# Altium PCB Motor Driver.PcbDoc
Units mm, origin at the board's own origin, x right, y up, seen from the top; angles counter-clockwise.
Board outline 62.7 x 50.04 mm, 2 copper layers (Top Layer, Bottom Layer); 64 components, 48 nets, 252 pads, 522 vias.
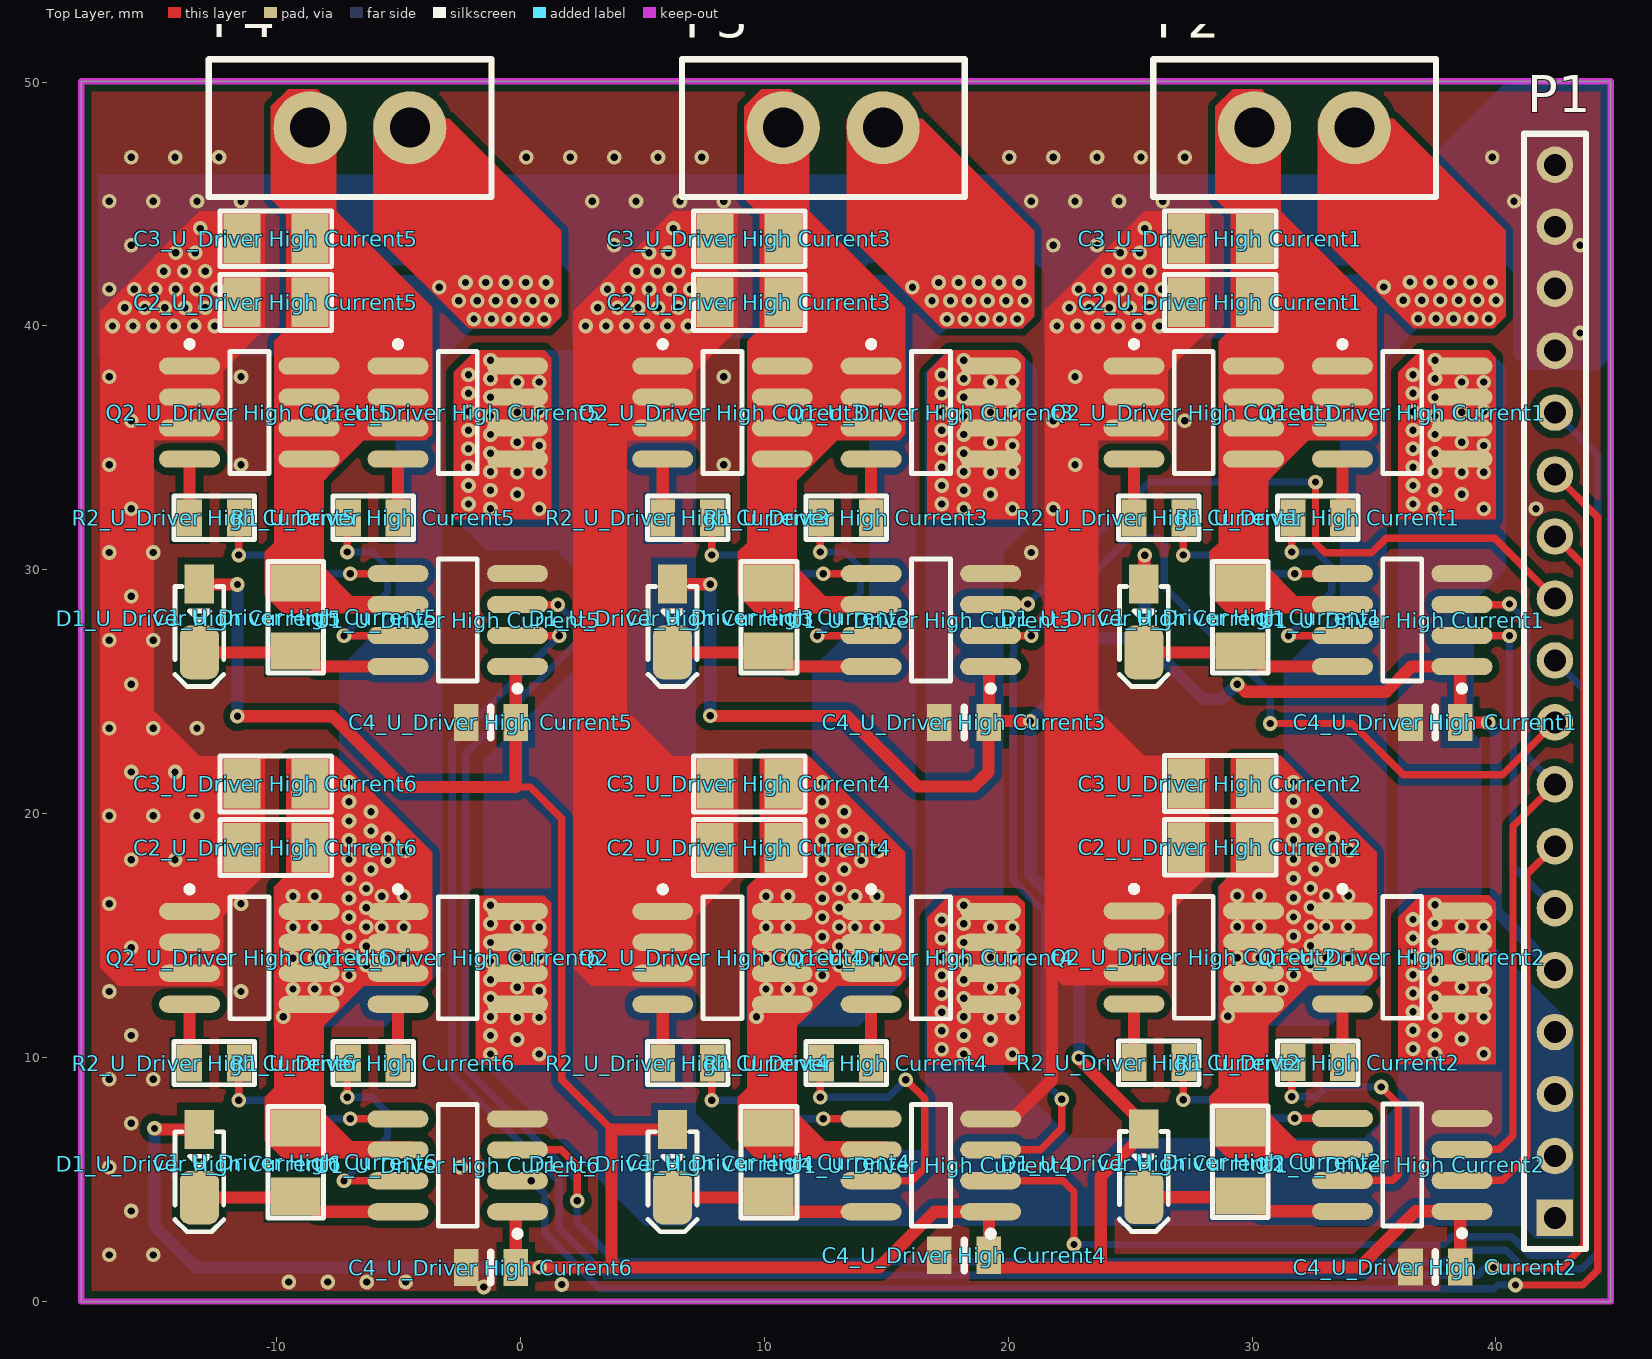
[diagram p0: Top Layer view]
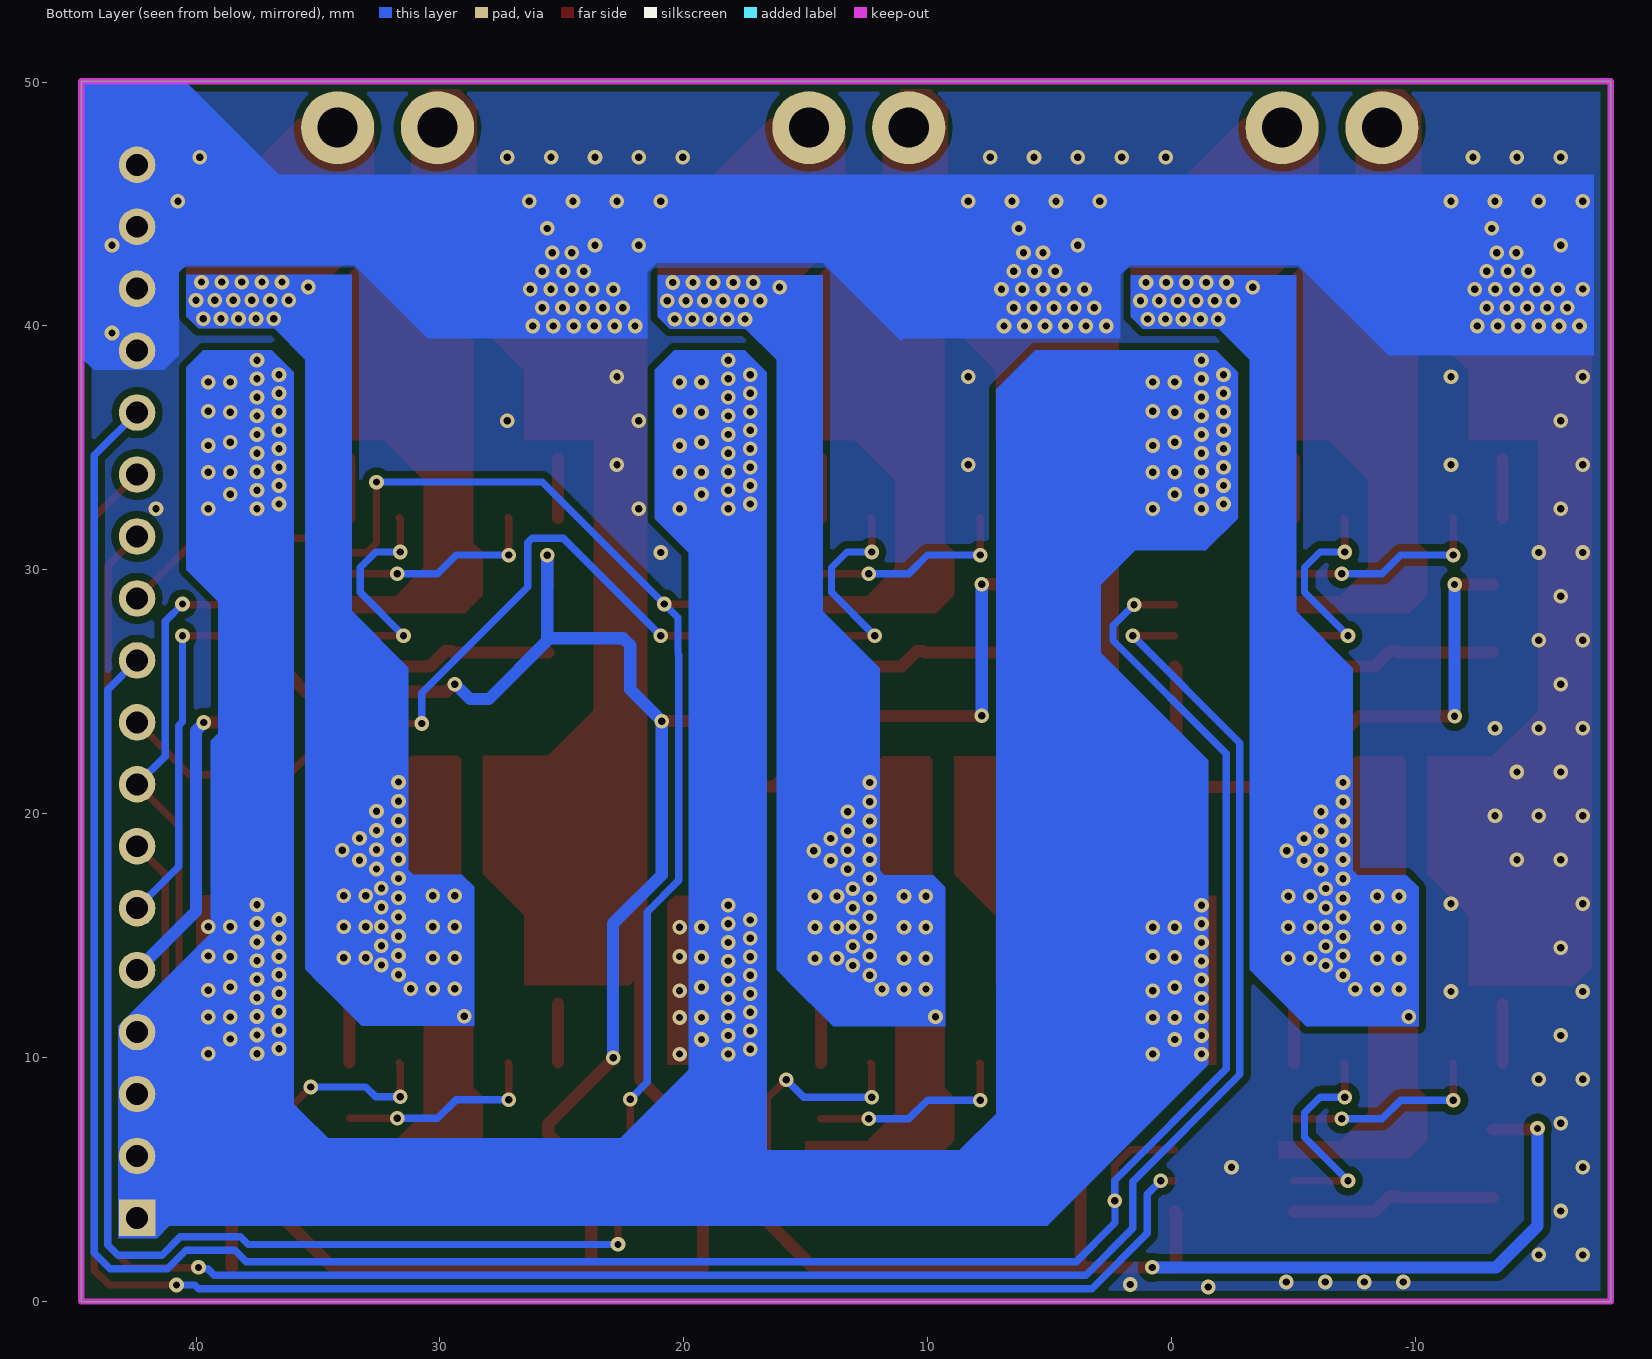
[diagram p1: Bottom Layer view, seen from below]
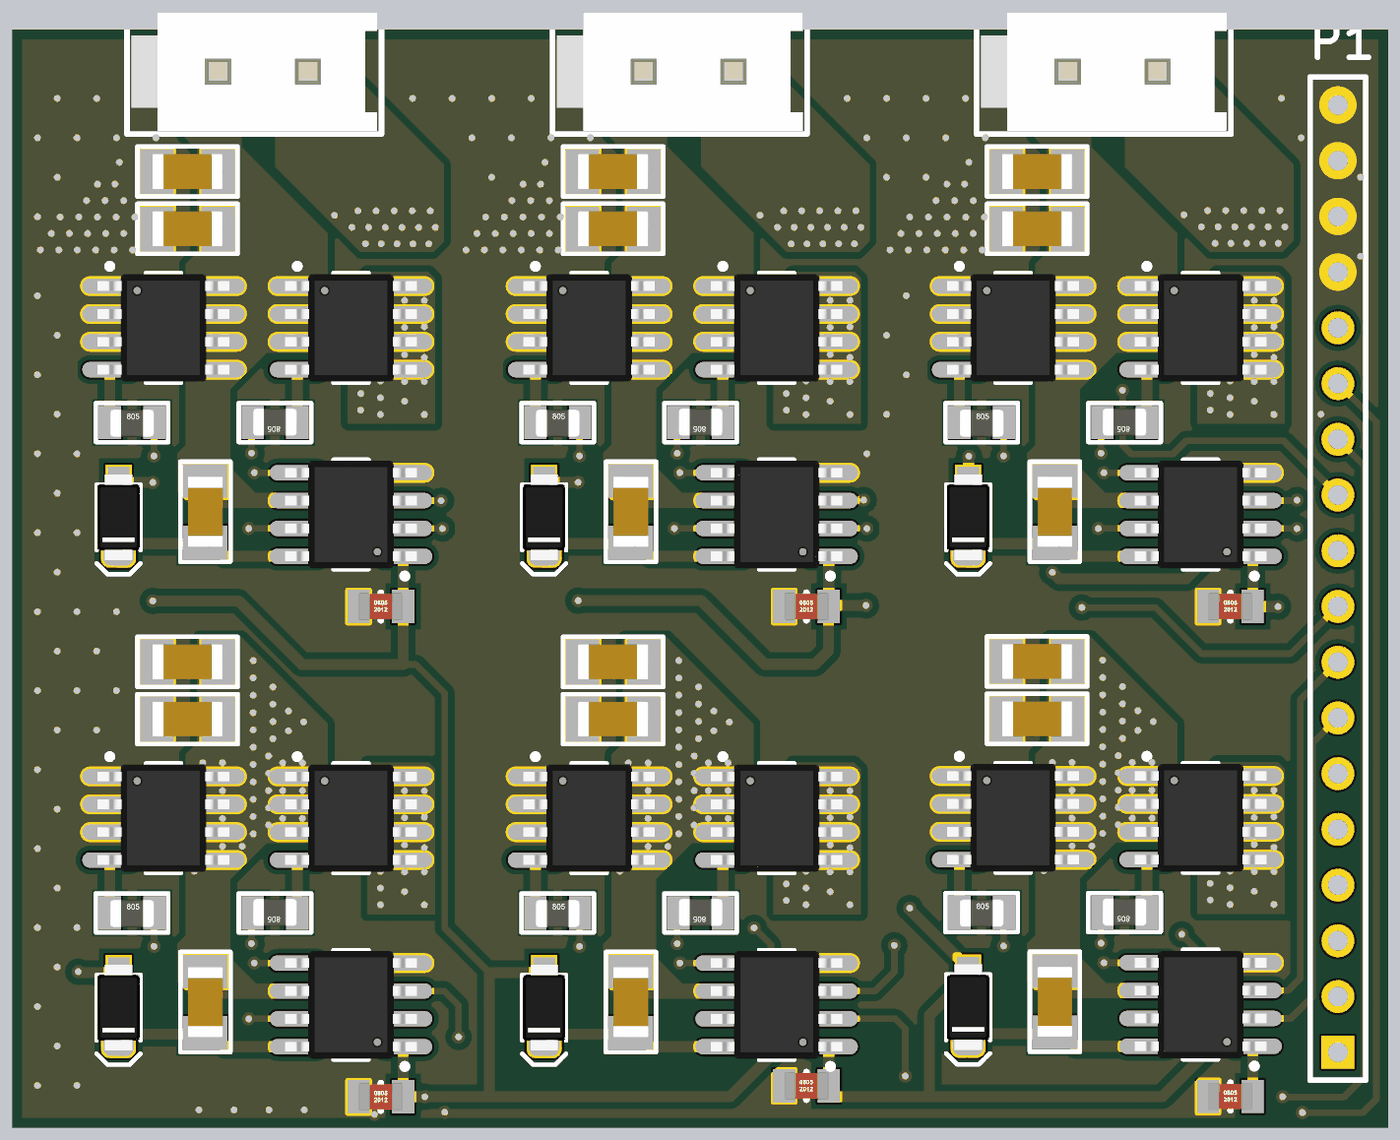
[diagram p2: 3D render of the assembled board from above, using the file's embedded part models]

## Layer stack, top to bottom
Top Solder: solder mask 0.0102, Solder Resist, Dk 3.5
Top Layer: signal copper 0.0356
Dielectric 1: dielectric 0.32, FR-4, Dk 4.8
Bottom Layer: signal copper 0.0356
Bottom Solder: solder mask 0.0102, Solder Resist, Dk 3.5

## Board outline
-18,0 -18,50.038 44.704,50.038 44.704,0

## Design rules (kind name [scope] priority, off if disabled: settings)
Clearance Clearance_1 [InNamedPolygon('TOP') Or InNamedPolygon('BOT')] p1: gap=0.3 ignorepadtopadclearanceinfootprint=FALSE
Clearance [All] p2: gap=0.254 ignorepadtopadclearanceinfootprint=FALSE except(0: Arc-Hole Track-Hole SMDPad-Hole THPad-Hole Via-Hole Fill-Hole Poly-Hole Region-Hole Text-Hole)
PolygonConnect [All] p1: connectstyle=Direct reliefconductorwidth=0.254 reliefentries=4 polygonreliefangle="90 Angle" airgapwidth=0.254
RoomDefinition "U_Driver High Current3" [InComponentClass('U_Driver High Current3')] p1: confinementstyle=ConfineIn formatcopy=TRUE lockcomponents=FALSE outline 21.114,22.777 21.114,45.085 3.842,45.085 3.842,22.777
RoomDefinition "U_Driver High Current4" [InComponentClass('U_Driver High Current4')] p2: confinementstyle=ConfineIn formatcopy=TRUE lockcomponents=FALSE outline 21.114,0.425 21.114,22.733 3.842,22.733 3.842,0.425
RoomDefinition "U_Driver High Current6" [InComponentClass('U_Driver High Current6')] p3: confinementstyle=ConfineIn formatcopy=TRUE lockcomponents=FALSE outline 1.715,0.425 1.715,22.733 -15.557,22.733 -15.557,0.425
RoomDefinition "U_Driver High Current5" [InComponentClass('U_Driver High Current5')] p4: confinementstyle=ConfineIn formatcopy=TRUE lockcomponents=FALSE outline 1.715,22.777 1.715,45.085 -15.557,45.085 -15.557,22.777
RoomDefinition "U_Driver High Current2" [InComponentClass('U_Driver High Current2')] p5: confinementstyle=ConfineIn formatcopy=TRUE lockcomponents=FALSE outline 40.439,0.442 40.439,22.75 23.167,22.75 23.167,0.442
RoomDefinition "U_Driver High Current1" [InComponentClass('U_Driver High Current1')] p6: confinementstyle=ConfineIn formatcopy=TRUE lockcomponents=FALSE outline 40.439,22.777 40.439,45.085 23.167,45.085 23.167,22.777
RoutingVias [All] p1: holewidth=0.3 width=0.6 viastyle="Through Hole" minholewidth=0.3 minwidth=0.6 maxholewidth=0.5 maxwidth=1
SolderMaskExpansion VIA [IsVia] p1: expansion=0.102 istentingtop=TRUE
SolderMaskExpansion [All] p2: expansion=0.102 istentingtop=FALSE
Width [All] p1: maxlimit=2 minlimit=0.3 preferedwidth=1
30 further rules are at their usual default settings.

## Classes and differential pairs
net class OUT[1..6]: OUT1 OUT2 OUT3 OUT4 OUT5 OUT6
channel class "Driver High Current": "U_Driver High Current1" "U_Driver High Current2" "U_Driver High Current3" "U_Driver High Current4" "U_Driver High Current5" "U_Driver High Current6"
net class SD[1..6]: SD1 SD3 SD5
net class IN[1..6]: IN1 IN2 IN3 IN4 IN5 IN6
component class "U_Driver High Current6": "C1_U_Driver High Current6" "C2_U_Driver High Current6" "C3_U_Driver High Current6" "C4_U_Driver High Current6" "D1_U_Driver High Current6" "Q1_U_Driver High Current6" "Q2_U_Driver High Current6" "R1_U_Driver High Current6" "R2_U_Driver High Current6" "U1_U_Driver High Current6"
component class "U_Driver High Current5": "C1_U_Driver High Current5" "C2_U_Driver High Current5" "C3_U_Driver High Current5" "C4_U_Driver High Current5" "D1_U_Driver High Current5" "Q1_U_Driver High Current5" "Q2_U_Driver High Current5" "R1_U_Driver High Current5" "R2_U_Driver High Current5" "U1_U_Driver High Current5"
component class "U_Driver High Current4": "C1_U_Driver High Current4" "C2_U_Driver High Current4" "C3_U_Driver High Current4" "C4_U_Driver High Current4" "D1_U_Driver High Current4" "Q1_U_Driver High Current4" "Q2_U_Driver High Current4" "R1_U_Driver High Current4" "R2_U_Driver High Current4" "U1_U_Driver High Current4"
component class "U_Driver High Current3": "C1_U_Driver High Current3" "C2_U_Driver High Current3" "C3_U_Driver High Current3" "C4_U_Driver High Current3" "D1_U_Driver High Current3" "Q1_U_Driver High Current3" "Q2_U_Driver High Current3" "R1_U_Driver High Current3" "R2_U_Driver High Current3" "U1_U_Driver High Current3"
component class "U_Driver High Current2": "C1_U_Driver High Current2" "C2_U_Driver High Current2" "C3_U_Driver High Current2" "C4_U_Driver High Current2" "D1_U_Driver High Current2" "Q1_U_Driver High Current2" "Q2_U_Driver High Current2" "R1_U_Driver High Current2" "R2_U_Driver High Current2" "U1_U_Driver High Current2"
component class "U_Driver High Current1": "C1_U_Driver High Current1" "C2_U_Driver High Current1" "C3_U_Driver High Current1" "C4_U_Driver High Current1" "D1_U_Driver High Current1" "Q1_U_Driver High Current1" "Q2_U_Driver High Current1" "R1_U_Driver High Current1" "R2_U_Driver High Current1" "U1_U_Driver High Current1"
component class main: P1 P2 P3 P4

## Components (designator, comment, footprint, x,y, rotation, side; value= is the part's Value field where it differs from the comment)
"C1_U_Driver High Current1" "10UF" SMD-1206C 29.517,28.067 r180 top value=0.033µF (schematic designator C1)
"C1_U_Driver High Current2" "10UF" SMD-1206C 29.517,5.732 r180 top value=0.033µF (schematic designator C1)
"C1_U_Driver High Current3" "10UF" SMD-1206C 10.192,28.067 r180 top value=0.033µF (schematic designator C1)
"C1_U_Driver High Current4" "10UF" SMD-1206C 10.192,5.715 r180 top value=0.033µF (schematic designator C1)
"C1_U_Driver High Current5" "10UF" SMD-1206C -9.207,28.067 r180 top value=0.033µF (schematic designator C1)
"C1_U_Driver High Current6" "10UF" SMD-1206C -9.207,5.715 r180 top value=0.033µF (schematic designator C1)
"C2_U_Driver High Current1" "10UF" SMD-1206C 28.705,40.965 r270 top value=0.033µF (schematic designator C2)
"C2_U_Driver High Current2" "10UF" SMD-1206C 28.705,18.63 r270 top value=0.033µF (schematic designator C2)
"C2_U_Driver High Current3" "10UF" SMD-1206C 9.38,40.965 r270 top value=0.033µF (schematic designator C2)
"C2_U_Driver High Current4" "10UF" SMD-1206C 9.38,18.613 r270 top value=0.033µF (schematic designator C2)
"C2_U_Driver High Current5" "10UF" SMD-1206C -10.019,40.965 r270 top value=0.033µF (schematic designator C2)
"C2_U_Driver High Current6" "10UF" SMD-1206C -10.019,18.613 r270 top value=0.033µF (schematic designator C2)
"C3_U_Driver High Current1" "10UF" SMD-1206C 28.705,43.576 r270 top value=0.033µF (schematic designator C3)
"C3_U_Driver High Current2" "10UF" SMD-1206C 28.705,21.241 r270 top value=0.033µF (schematic designator C3)
"C3_U_Driver High Current3" "10UF" SMD-1206C 9.38,43.576 r270 top value=0.033µF (schematic designator C3)
"C3_U_Driver High Current4" "10UF" SMD-1206C 9.38,21.224 r270 top value=0.033µF (schematic designator C3)
"C3_U_Driver High Current5" "10UF" SMD-1206C -10.019,43.576 r270 top value=0.033µF (schematic designator C3)
"C3_U_Driver High Current6" "10UF" SMD-1206C -10.019,21.224 r270 top value=0.033µF (schematic designator C3)
"C4_U_Driver High Current1" "100nF" SMD-0805C 37.518,23.749 r270 top value=10000pF (schematic designator C4)
"C4_U_Driver High Current2" "100nF" SMD-0805C 37.518,1.414 r270 top value=10000pF (schematic designator C4)
"C4_U_Driver High Current3" "100nF" SMD-0805C 18.193,23.749 r270 top value=10000pF (schematic designator C4)
"C4_U_Driver High Current4" "100nF" SMD-0805C 18.193,1.897 r270 top value=10000pF (schematic designator C4)
"C4_U_Driver High Current5" "100nF" SMD-0805C -1.206,23.749 r270 top value=10000pF (schematic designator C4)
"C4_U_Driver High Current6" "100nF" SMD-0805C -1.206,1.397 r270 top value=10000pF (schematic designator C4)
"D1_U_Driver High Current1" "1N5819" D_SOD123W 25.562,27.813 r270 top (schematic designator D1)
"D1_U_Driver High Current2" "1N5819" D_SOD123W 25.562,5.478 r270 top (schematic designator D1)
"D1_U_Driver High Current3" "1N5819" D_SOD123W 6.237,27.813 r270 top (schematic designator D1)
"D1_U_Driver High Current4" "1N5819" D_SOD123W 6.237,5.461 r270 top (schematic designator D1)
"D1_U_Driver High Current5" "1N5819" D_SOD123W -13.162,27.813 r270 top (schematic designator D1)
"D1_U_Driver High Current6" "1N5819" D_SOD123W -13.162,5.461 r270 top (schematic designator D1)
P1 "FHDR_1X18" FHDR1X18-254P 42.418,3.429 r90 top locked
P2 "M1" "ATX 2PIN" 34.197,48.133 r90 top
P3 "M2" "ATX 2PIN" 14.872,48.133 r90 top
P4 "M3" "ATX 2PIN" -4.527,48.133 r90 top
"Q1_U_Driver High Current1" "IRF7811AV" SOIC-8 31.967,33.401 r0 top (schematic designator Q1)
"Q1_U_Driver High Current2" "IRF7811AV" SOIC-8 31.967,11.066 r0 top (schematic designator Q1)
"Q1_U_Driver High Current3" "IRF7811AV" SOIC-8 12.642,33.401 r0 top (schematic designator Q1)
"Q1_U_Driver High Current4" "IRF7811AV" SOIC-8 12.642,11.049 r0 top (schematic designator Q1)
"Q1_U_Driver High Current5" "IRF7811AV" SOIC-8 -6.757,33.401 r0 top (schematic designator Q1)
"Q1_U_Driver High Current6" "IRF7811AV" SOIC-8 -6.757,11.049 r0 top (schematic designator Q1)
"Q2_U_Driver High Current1" "IRF7811AV" SOIC-8 23.421,33.401 r0 top (schematic designator Q2)
"Q2_U_Driver High Current2" "IRF7811AV" SOIC-8 23.421,11.066 r0 top (schematic designator Q2)
"Q2_U_Driver High Current3" "IRF7811AV" SOIC-8 4.096,33.401 r0 top (schematic designator Q2)
"Q2_U_Driver High Current4" "IRF7811AV" SOIC-8 4.096,11.049 r0 top (schematic designator Q2)
"Q2_U_Driver High Current5" "IRF7811AV" SOIC-8 -15.303,33.401 r0 top (schematic designator Q2)
"Q2_U_Driver High Current6" "IRF7811AV" SOIC-8 -15.303,11.049 r0 top (schematic designator Q2)
"R1_U_Driver High Current1" "10R" SMD-0805-RES 32.692,32.131 r90 top value=1 (schematic designator R1)
"R1_U_Driver High Current2" "10R" SMD-0805-RES 32.692,9.796 r90 top value=1 (schematic designator R1)
"R1_U_Driver High Current3" "10R" SMD-0805-RES 13.367,32.131 r90 top value=1 (schematic designator R1)
"R1_U_Driver High Current4" "10R" SMD-0805-RES 13.367,9.779 r90 top value=1 (schematic designator R1)
"R1_U_Driver High Current5" "10R" SMD-0805-RES -6.032,32.131 r90 top value=1 (schematic designator R1)
"R1_U_Driver High Current6" "10R" SMD-0805-RES -6.032,9.779 r90 top value=1 (schematic designator R1)
"R2_U_Driver High Current1" "10R" SMD-0805-RES 26.18,32.131 r270 top value=1 (schematic designator R2)
"R2_U_Driver High Current2" "10R" SMD-0805-RES 26.18,9.796 r270 top value=1 (schematic designator R2)
"R2_U_Driver High Current3" "10R" SMD-0805-RES 6.855,32.131 r270 top value=1 (schematic designator R2)
"R2_U_Driver High Current4" "10R" SMD-0805-RES 6.855,9.779 r270 top value=1 (schematic designator R2)
"R2_U_Driver High Current5" "10R" SMD-0805-RES -12.544,32.131 r270 top value=1 (schematic designator R2)
"R2_U_Driver High Current6" "10R" SMD-0805-RES -12.544,9.779 r270 top value=1 (schematic designator R2)
"U1_U_Driver High Current1" "IR2104S" SOIC-8 40.349,30.988 r180 top (schematic designator U1)
"U1_U_Driver High Current2" "IR2104S" SOIC-8 40.349,8.653 r180 top (schematic designator U1)
"U1_U_Driver High Current3" "IR2104S" SOIC-8 21.024,30.988 r180 top (schematic designator U1)
"U1_U_Driver High Current4" "IR2104S" SOIC-8 21.024,8.636 r180 top (schematic designator U1)
"U1_U_Driver High Current5" "IR2104S" SOIC-8 1.625,30.988 r180 top (schematic designator U1)
"U1_U_Driver High Current6" "IR2104S" SOIC-8 1.625,8.636 r180 top (schematic designator U1)

## Footprints (in the part's own frame and the unit in brackets; to place one, negate y for a bottom-side part, rotate by r counter-clockwise, add the part's x,y. Pads: shape width x height; smd on the part's side, far side on the other; paste and mask are expansions set on the pad)
"ATX 2PIN" [mm]
  round 3 hole 1.65: 1(0,4.095) 2(0,0)
  silkscreen extent -2.85,-3.35 2.8,8.25, body extent -2.7,-3.15 2.7,8.05, height 13.01
D_SOD123W [mm] "PowerDI-123, SOD123, DO-213AA, 1206D"
  rect 1.6x1.2 smd paste-0.1 mask+0.1: 1(-1.6,0)
  rrect50% 2.2x1.6 smd paste-0.1 mask+0.1: 2(1.2,0)
  Top Layer pour cut-out: -1.016,1.1 -1.016,-1.1 1.016,-1.1 1.016,1.1
  silkscreen extent -1.5,-1 2.6,1, body extent -1.95,-0.97 1.95,0.96, height 1
FHDR1X18-254P [mm] "Female Header 1X18 with 2.54 mm Pitch"
  rect 1.5x1.5 hole 0.9: 1(0,0)
  round 1.5 hole 0.9: 2(2.54,0) 3(5.08,0) 4(7.62,0) 5(10.16,0) 6(12.7,0) 7(15.24,0) 8(17.78,0) 9(20.32,0) 10(22.86,0) 11(25.4,0) 12(27.94,0) 13(30.48,0) 14(33.02,0) 15(35.56,0) 16(38.1,0) 17(40.64,0) 18(43.18,0)
  silkscreen extent -1.27,-1.27 44.45,1.27
SMD-0805-RES [mil]
  rect 60x40 smd: 1(0,40) 2(0,-40)
  silkscreen extent -35,-65 35,65, body extent -24,-39 26,39, height 31
SMD-0805C [mil]
  rect 60x40 smd: 1(0,40) 2(0,-40)
  silkscreen extent -25,0 25,0, body extent -25,-39 25,39, height 35
SMD-1206C [mil]
  rect 80x60 smd: 1(0,55) 2(0,-55)
  silkscreen extent -45,-90 45,90, body extent -31,-63 32,63, height 39
SOIC-8 [mm]
  oval 2.5x0.7 smd: 1(1.741,4.953) 2(1.741,3.683) 3(1.741,2.413) 4(1.741,1.143) 5(6.641,1.143) 6(6.641,2.413) 7(6.641,3.683) 8(6.641,4.953)
  silkscreen extent 1.62,0.55 4.99,5.98, body extent 1.19,0.6 7.19,5.5, height 1.7

## Part data
"C1_U_Driver High Current1" "C1_U_Driver High Current2" "C1_U_Driver High Current3" "C1_U_Driver High Current4" "C1_U_Driver High Current5" "C1_U_Driver High Current6" "C2_U_Driver High Current1" "C2_U_Driver High Current2" "C2_U_Driver High Current3" "C2_U_Driver High Current4" "C2_U_Driver High Current5" "C2_U_Driver High Current6" "C3_U_Driver High Current1" "C3_U_Driver High Current2" "C3_U_Driver High Current3" "C3_U_Driver High Current4" "C3_U_Driver High Current5" "C3_U_Driver High Current6": library part GC331AD72E333KX01D, "CAP CER 10UF 250V X7T 1206", Digi-Key Part Number=490-13989-1-ND, Manufacturer="Murata Electronics North America", Operating Temperature="-55°C ~ 125°C", Package / Case="1206 (3216 Metric)", Ratings=AEC-Q200, Temperature Coefficient=X7T, Tolerance=±10%, Voltage=250V, @ qty=0, Applications=Automotive, Datasheets=http://search.murata.co.jp/Ceramy/image/img/A01X/G101/ENG/GC331AD72E333KX01-01.pdf, Factory Stock=0, Features=-, Height - Seated (Max)=-, Image=//media.digikey.com/Renders/Murata%20Renders/1206(GC3)320x160.jpg, Lead Spacing=-, Lead Style=-, Minimum Quantity=1, Mounting Type="Surface Mount, MLCC", Packaging="Cut Tape (CT)", Part Number=GC331AD72E333KX01D, Part Status=Active, Quantity Available=3999, Series=GC3, Size / Dimension="0.126\" L x 0.063\" W (3.20mm x 1.60mm)", Thickness (Max)="0.039\" (1.00mm)", Unit Price (USD)=0.33
"C4_U_Driver High Current1" "C4_U_Driver High Current2" "C4_U_Driver High Current3" "C4_U_Driver High Current4" "C4_U_Driver High Current5" "C4_U_Driver High Current6": library part GC321AD72E103KX01D, "CAP CER 100nF 50V X7T 0805", Digi-Key Part Number=490-13986-1-ND, Manufacturer="Murata Electronics North America", Operating Temperature="-55°C ~ 125°C", Package / Case="0805 (2012 Metric)", Ratings=AEC-Q200, Temperature Coefficient=X7T, Tolerance=±10%, Voltage=250V, @ qty=0, Applications=Automotive, Datasheets=http://search.murata.co.jp/Ceramy/image/img/A01X/G101/ENG/GC321AD72E103KX01-01.pdf, Factory Stock=0, Features=-, Height - Seated (Max)=-, Image=//media.digikey.com/Renders/Murata%20Renders/0805(GC3)200x125.jpg, Lead Spacing=-, Lead Style=-, Minimum Quantity=1, Mounting Type="Surface Mount, MLCC", Packaging="Cut Tape (CT)", Part Number=GC321AD72E103KX01D, Part Status=Active, Quantity Available=4000, Series=GC3, Size / Dimension="0.079\" L x 0.049\" W (2.00mm x 1.25mm)", Thickness (Max)="0.039\" (1.00mm)", Unit Price (USD)=0.3
"D1_U_Driver High Current1" "D1_U_Driver High Current2" "D1_U_Driver High Current3" "D1_U_Driver High Current4" "D1_U_Driver High Current5" "D1_U_Driver High Current6": library part DIODE_SMD_SCHOTTKY_1N5819, "DIODE, SCHOTTKY, 40V, 1A", ASSEMBLY=ASSEMBLY, DESC=DESCRIPTION, MANF=DIODES, MANF_P#=1N5819HW-7-F, PARAM=40V, PARAM2=1A, PRICE=PRICE
P1: "Female Header 1X18"
P2 P3 P4: library part "ATX 2PIN", "ATX 2PIN"
"Q1_U_Driver High Current1" "Q1_U_Driver High Current2" "Q1_U_Driver High Current3" "Q1_U_Driver High Current4" "Q1_U_Driver High Current5" "Q1_U_Driver High Current6" "Q2_U_Driver High Current1" "Q2_U_Driver High Current2" "Q2_U_Driver High Current3" "Q2_U_Driver High Current4" "Q2_U_Driver High Current5" "Q2_U_Driver High Current6": "HEXFET Power MOSFET", Code_IPC=SOIC127P600-8, Code_JEDEC=MS-012-AA, ComponentLink1Description="Manufacturer Link", ComponentLink1URL=http://www.irf.com/, ComponentLink2Description=Datasheet, ComponentLink2URL=http://www.irf.com/product-info/datasheets/data/irf7811av.pdf, DatasheetVersion=13-Dec-2000, LatestRevisionDate=13-Apr-2006, LatestRevisionNote="IPC-7351 Footprint Added.", PackageDescription="8-Pin Plastic Small Outline Integrated Circuit 1.27 mm Pitch", PackageReference=SO-8, PackageVersion=Feb-2001, Published=17-Sep-2003, Publisher="Altium Limited"
"R1_U_Driver High Current1" "R1_U_Driver High Current2" "R1_U_Driver High Current3" "R1_U_Driver High Current4" "R1_U_Driver High Current5" "R1_U_Driver High Current6" "R2_U_Driver High Current1" "R2_U_Driver High Current2" "R2_U_Driver High Current3" "R2_U_Driver High Current4" "R2_U_Driver High Current5" "R2_U_Driver High Current6": library part ERJ-6BQF1R0V, "RES SMD 10R OHM 1% 1/3W 0805", Digi-Key Part Number=P17499CT-ND, Manufacturer="Panasonic Electronic Components", Operating Temperature="-55°C ~ 125°C", Package / Case="0805 (2012 Metric)", Power (Watts)="0.333W, 1/3W", Supplier Device Package=0805, Temperature Coefficient=±200ppm/°C, Tolerance=±1%, @ qty=1500, Composition="Thick Film", Datasheets=https://industrial.panasonic.com/cdbs/www-data/pdf/RDA0000/AOA0000C239.pdf, Factory Stock=0, Failure Rate=-, Features="Automotive AEC-Q200, Current Sense", Height - Seated (Max)="0.028\" (0.70mm)", Image=//media.digikey.com/Renders/Panasonic%20Renders/ERJ-0805%20Pkg.jpg, Minimum Quantity=1, Number of Terminations=2, Packaging="Cut Tape (CT)", Part Number=ERJ-6BQF1R0V, Part Status=Active, Quantity Available=808, Series=ERJ, Size / Dimension="0.079\" L x 0.049\" W (2.00mm x 1.25mm)", Unit Price (USD)=0.05834
"U1_U_Driver High Current1" "U1_U_Driver High Current2" "U1_U_Driver High Current3" "U1_U_Driver High Current4" "U1_U_Driver High Current5" "U1_U_Driver High Current6": "High and Low Side Driver", Code_IPC=SOIC127P600-8, Code_JEDEC=MS-012-AA, ComponentLink1Description="Manufacturer Link", ComponentLink1URL=http://www.irf.com/, ComponentLink2Description=Datasheet, ComponentLink2URL=http://www.irf.com/product-info/datasheets/data/ir2104.pdf, DatasheetVersion=PD600461, LatestRevisionDate=13-Apr-2006, LatestRevisionNote="IPC-7351 Footprint Added.", PackageDescription="8-Pin Plastic Small Outline Integrated Circuit 1.27 mm Pitch", PackageReference=SO-8, PackageVersion=Feb-2001, Published=8-Jun-2000, Publisher="Altium Limited"

## Via types
v1: diameter 0.6, hole 0.3, Top Layer to Bottom Layer, tented both sides, 522 vias

## Nets (pads, with @x,y where several pads share a name; then routed paths per layer and width w, separated by ;. In a path a pad name is that pad's centre, name@x,y a point inside that pad or via, vN(x,y) a via of type N, cw(c..) or ccw(c..) an arc to the next point about the centre after c; other vN are vias at no path point)
+12: "C4_U_Driver High Current1.1" "C4_U_Driver High Current2.1" "C4_U_Driver High Current3.1" "C4_U_Driver High Current4.1" "C4_U_Driver High Current5.1" "C4_U_Driver High Current6.1" "D1_U_Driver High Current1.1" "D1_U_Driver High Current2.1" "D1_U_Driver High Current3.1" "D1_U_Driver High Current4.1" "D1_U_Driver High Current5.1" "D1_U_Driver High Current6.1" "U1_U_Driver High Current1.1" "U1_U_Driver High Current2.1" "U1_U_Driver High Current3.1" "U1_U_Driver High Current4.1" "U1_U_Driver High Current5.1" "U1_U_Driver High Current6.1" P1.5 | length 211.2
  Top Layer w0.3: -0.19,21.1 0.4,21.1 1.7,19.8 1.7,9.1 3.739,7.061
  Top Layer w0.5: v1(-15,7.1) -14.973,7.1 -14.934,7.061 -13.162,7.061 ; -13.162,29.413 -13.149,29.4 v1(-11.6,29.4) ; v1(-11.6,24) -7.7,24 -4.8,21.1 -0.19,21.1 -0.19,23.749 -0.19,25.961 -0.116,26.035 ; -0.116,3.683 -0.19,3.609 -0.19,1.397 -0.187,1.4 v1(0.8,1.4) 3.739,1.4 ; 6.224,29.426 6.237,29.413 v1(7.786,29.413) ; 6.237,7.061 3.739,7.061 3.739,1.4 ; v1(7.786,24.013) 13.387,24.013 16.287,21.113 18.593,21.113 19.196,21.716 19.196,23.749 ; 19.283,26.035 19.209,25.961 19.209,23.749 19.416,23.749 19.467,23.8 v1(20.908,23.8) ; v1(22.9,10) 22.919,9.981 22.919,9.921 25.562,7.278 25.562,6.878 23.8,5.116 23.8,1.397 ; 25.562,29.413 25.581,29.432 25.581,30.577 v1(25.6,30.596) ; v1(29.396,25.308) 29.423,25.308 29.731,25 35.5,25 36.535,26.035 38.608,26.035 38.534,25.961 38.534,23.749 38.54,23.743 v1(39.685,23.743) ; 38.534,1.414 38.534,3.626 38.608,3.7 36.7,3.7 34.397,1.397 23.8,1.397 ; 3.739,1.4 14.7,1.4 16.983,3.683 19.283,3.683 19.209,3.609 19.209,1.397 23.8,1.397
  Bottom Layer w0.5: v1(-15,7.1) -15,3.1 -13.3,1.4 v1(0.8,1.4) ; v1(-11.6,24) v1(-11.6,29.4) ; v1(7.786,24.013) v1(7.786,29.413) ; v1(22.9,10) 22.9,15.5 20.908,17.492 v1(20.908,23.8) 22.2,25.092 22.2,26.907 22.493,27.2 25.5,27.2 25.6,27.1 ; v1(25.6,30.596) 25.6,27.1 ; v1(29.396,25.308) 29.369,25.308 28.761,24.7 28,24.7 25.6,27.1 ; v1(39.685,23.743) 39.685,23.716 40,23.401 40,16.007 P1.5
+24V: "Q1_U_Driver High Current1.5" "Q1_U_Driver High Current1.6" "Q1_U_Driver High Current1.7" "Q1_U_Driver High Current1.8" "Q1_U_Driver High Current2.5" "Q1_U_Driver High Current2.6" "Q1_U_Driver High Current2.7" "Q1_U_Driver High Current2.8" "Q1_U_Driver High Current3.5" "Q1_U_Driver High Current3.6" "Q1_U_Driver High Current3.7" "Q1_U_Driver High Current3.8" "Q1_U_Driver High Current4.5" "Q1_U_Driver High Current4.6" "Q1_U_Driver High Current4.7" "Q1_U_Driver High Current4.8" "Q1_U_Driver High Current5.5" "Q1_U_Driver High Current5.6" "Q1_U_Driver High Current5.7" "Q1_U_Driver High Current5.8" "Q1_U_Driver High Current6.5" "Q1_U_Driver High Current6.6" "Q1_U_Driver High Current6.7" "Q1_U_Driver High Current6.8" P1.1 P1.2 P1.3 P1.4
  other v1: -1.224,10.148 0.776,10.148 18.175,10.148 20.175,10.148 37.5,10.165 39.5,10.165 17.275,10.348 36.6,10.365 -0.124,10.748 19.275,10.748 38.6,10.765 -1.224,10.91 18.175,10.91 37.5,10.928 17.275,11.105 36.6,11.122 -0.124,11.648 0.776,11.648 19.275,11.648 20.175,11.648 38.6,11.665 39.5,11.665 -1.224,11.673 18.175,11.673 37.5,11.69 17.275,11.862 36.6,11.879 -1.224,12.435 18.175,12.435 37.5,12.453 17.275,12.619 36.6,12.637 0.776,12.748 20.175,12.748 39.5,12.765 -0.124,12.881 19.275,12.881 38.6,12.899 -1.224,13.198 18.175,13.198 37.5,13.215 17.275,13.377 36.6,13.394 -1.224,13.96 18.175,13.96 37.5,13.978 -0.124,14.115 17.275,14.134 19.275,14.115 38.6,14.132 0.776,14.148 20.175,14.148 36.6,14.151 39.5,14.165 -1.224,14.723 18.175,14.723 37.5,14.74 17.275,14.891 36.6,14.908 -0.124,15.348 0.776,15.348 19.275,15.348 20.175,15.348 38.6,15.365 39.5,15.365 -1.224,15.485 18.175,15.485 37.5,15.503 17.275,15.648 36.6,15.665 -1.224,16.248 18.175,16.248 37.5,16.265 -1.224,32.5 0.776,32.5 18.175,32.5 20.175,32.5 37.5,32.5 39.5,32.5 -2.124,32.7 17.275,32.7 36.6,32.7 -0.124,33.1 19.275,33.1 38.6,33.1 -1.224,33.262 18.175,33.262 37.5,33.262 -2.124,33.457 17.275,33.457 36.6,33.457 -0.124,34 0.776,34 19.275,34 20.175,34 38.6,34 39.5,34 -1.224,34.025 18.175,34.025 37.5,34.025 -2.124,34.214 17.275,34.214 36.6,34.214 -1.224,34.787 18.175,34.787 37.5,34.787 -2.124,34.971 17.275,34.971 36.6,34.971 0.776,35.1 20.175,35.1 39.5,35.1 -0.124,35.233 19.275,35.233 38.6,35.233 -1.224,35.55 18.175,35.55 37.5,35.55 -2.124,35.729 17.275,35.729 36.6,35.729 -1.224,36.312 18.175,36.312 37.5,36.312 -2.124,36.486 -0.124,36.467 17.275,36.486 19.275,36.467 36.6,36.486 38.6,36.467 0.776,36.5 20.175,36.5 39.5,36.5 -1.224,37.075 18.175,37.075 37.5,37.075 -2.124,37.243 17.275,37.243 36.6,37.243 -0.124,37.7 0.776,37.7 19.275,37.7 20.175,37.7 38.6,37.7 39.5,37.7 -1.224,37.837 18.175,37.837 37.5,37.837 -2.124,38 17.275,38 36.6,38 -1.224,38.6 18.175,38.6 37.5,38.6
GND: "C2_U_Driver High Current1.2" "C2_U_Driver High Current2.2" "C2_U_Driver High Current3.2" "C2_U_Driver High Current4.2" "C2_U_Driver High Current5.2" "C2_U_Driver High Current6.2" "C3_U_Driver High Current1.2" "C3_U_Driver High Current2.2" "C3_U_Driver High Current3.2" "C3_U_Driver High Current4.2" "C3_U_Driver High Current5.2" "C3_U_Driver High Current6.2" "C4_U_Driver High Current1.2" "C4_U_Driver High Current2.2" "C4_U_Driver High Current3.2" "C4_U_Driver High Current4.2" "C4_U_Driver High Current5.2" "C4_U_Driver High Current6.2" "Q2_U_Driver High Current1.1" "Q2_U_Driver High Current1.2" "Q2_U_Driver High Current1.3" "Q2_U_Driver High Current2.1" "Q2_U_Driver High Current2.2" "Q2_U_Driver High Current2.3" "Q2_U_Driver High Current3.1" "Q2_U_Driver High Current3.2" "Q2_U_Driver High Current3.3" "Q2_U_Driver High Current4.1" "Q2_U_Driver High Current4.2" "Q2_U_Driver High Current4.3" "Q2_U_Driver High Current5.1" "Q2_U_Driver High Current5.2" "Q2_U_Driver High Current5.3" "Q2_U_Driver High Current6.1" "Q2_U_Driver High Current6.2" "Q2_U_Driver High Current6.3" "U1_U_Driver High Current1.4" "U1_U_Driver High Current2.4" "U1_U_Driver High Current3.4" "U1_U_Driver High Current4.4" "U1_U_Driver High Current5.4" "U1_U_Driver High Current6.4" P1.15 P1.16 P1.17 P1.18 | length 8.5
  Top Layer w0.5: 19.283,7.493 20.183,7.493 21.8,9.11 21.8,14.4
  other v1: -1.5,0.6 1.7,0.7 -9.5,0.8 -7.9,0.8 -6.3,0.8 -4.7,0.8 -16.856,1.913 -15.056,1.913 -15.956,3.713 -16.856,5.513 -2.456,5.513 -15.956,7.313 -16.856,9.113 -15.056,9.113 -15.956,10.913 -16.856,12.713 -11.456,12.713 -15.956,14.513 -16.856,16.313 -11.456,16.313 -15.956,18.113 -14.156,18.113 -16.856,19.913 -15.056,19.913 -13.256,19.913 -15.956,21.713 -14.156,21.713 -16.856,23.513 -15.056,23.513 -13.256,23.513 -15.956,25.313 -16.856,27.113 -15.056,27.113 -15.956,28.913 -16.856,30.713 -15.056,30.713 20.944,30.713 -15.956,32.513 21.844,32.513 41.644,32.513 -16.856,34.313 -11.456,34.313 8.344,34.313 22.744,34.313 -15.956,36.113 21.844,36.113 27.244,36.113 -16.856,37.913 -11.456,37.913 8.344,37.913 22.744,37.913 43.444,39.713 -16.724,40 -15.884,40 -15.044,40 -14.204,40 -13.364,40 -12.524,40 2.675,40 3.515,40 4.355,40 5.195,40 6.035,40 6.875,40 22,40 22.84,40 23.68,40 24.52,40 25.36,40 26.2,40 -16.224,40.75 -15.399,40.75 -14.574,40.75 -13.749,40.75 -12.924,40.75 3.175,40.75 4,40.75 4.825,40.75 5.65,40.75 6.475,40.75 22.5,40.75 23.325,40.75 24.15,40.75 24.975,40.75 25.8,40.75 -16.856,41.513 -15.824,41.5 -14.974,41.5 -14.124,41.5 -13.274,41.5 -12.424,41.5 3.575,41.5 4.425,41.5 5.275,41.5 6.125,41.5 6.975,41.5 22.9,41.5 23.75,41.5 24.6,41.5 25.45,41.5 26.3,41.5 -14.624,42.25 -13.774,42.25 -12.924,42.25 4.775,42.25 5.625,42.25 6.475,42.25 24.1,42.25 24.95,42.25 25.8,42.25 -14.124,43 -13.324,43 5.275,43 6.075,43 24.6,43 25.4,43 -15.956,43.313 3.844,43.313 21.844,43.313 23.644,43.313 43.444,43.313 -13.124,44 6.275,44 25.6,44 -16.856,45.113 -15.056,45.113 -13.256,45.113 -11.456,45.113 2.944,45.113 4.744,45.113 6.544,45.113 8.344,45.113 20.944,45.113 22.744,45.113 24.544,45.113 26.344,45.113 40.744,45.113 -15.956,46.913 -14.156,46.913 -12.356,46.913 0.244,46.913 2.044,46.913 3.844,46.913 5.644,46.913 7.444,46.913 20.044,46.913 21.844,46.913 23.644,46.913 25.444,46.913 27.244,46.913 39.844,46.913
IN1: "U1_U_Driver High Current1.2" P1.6 | length 13.9
  Top Layer w0.3: 38.608,27.305 38.611,27.302 40.551,27.302 v1(40.554,27.3)
  Bottom Layer w0.3: v1(40.554,27.3) 40.554,23.772 40.71,23.616 40.71,17.837 P1.6
IN2: "U1_U_Driver High Current2.2" P1.7 | length 16.3
  Top Layer w0.3: 38.608,4.97 40.27,4.97 41.264,5.964 41.264,17.515 P1.7
IN3: "U1_U_Driver High Current3.2" P1.9 | length 31.5
  Top Layer w0.3: 19.283,27.305 19.286,27.302 20.944,27.302 v1(20.946,27.3) ; v1(30.746,23.7) 34.1,23.7 36.2,21.6 40.269,21.6 P1.9
  Bottom Layer w0.3: v1(20.946,27.3) 24.946,31.3 26.224,31.3 26.4,31.124 26.4,29.3 30.746,24.954 v1(30.746,23.7)
IN4: "U1_U_Driver High Current4.2" P1.10 | length 51.8
  Top Layer w0.3: 19.283,4.953 22.247,4.953 22.7,4.5 v1(22.7,2.343)
  Bottom Layer w0.3: v1(22.7,2.343) 37.86,2.343 38.175,2.658 40.642,2.658 41.4,1.9 43.199,1.9 43.619,2.32 43.619,25.088 P1.10
IN5: "U1_U_Driver High Current5.2" P1.12 | length 102.5
  Top Layer w0.3: -0.116,27.305 -0.113,27.302 1.597,27.302 v1(1.6,27.3) ; v1(39.9,1.4) 39.915,1.385 42.685,1.385 43.619,2.319 43.619,30.168 P1.12
  Bottom Layer w0.3: v1(1.6,27.3) -2.795,22.905 -2.795,9.312 1.6,4.917 1.6,3 3.515,1.085 39.259,1.085 39.517,1.343 39.843,1.343 v1(39.9,1.4)
IN6: "U1_U_Driver High Current6.2" P1.13 | length 80.7
  Top Layer w0.3: -0.116,4.953 0.257,4.953 0.262,4.957 v1(0.442,4.957) ; v1(40.8,0.681) 43.564,0.681 44.173,1.29 44.173,32.154 P1.13
  Bottom Layer w0.3: v1(0.442,4.957) 1,4.399 1,2.796 3.265,0.531 39.9,0.531 40.05,0.681 v1(40.8,0.681)
"NetC1_U_Driver High Current1_1": "C1_U_Driver High Current1.1" "D1_U_Driver High Current1.2" "U1_U_Driver High Current1.8" | length 8.4
  Top Layer w0.5: 25.562,26.613 29.46,26.613 29.517,26.67 29.771,26.67 30.406,26.035 33.708,26.035
"NetC1_U_Driver High Current2_1": "C1_U_Driver High Current2.1" "D1_U_Driver High Current2.2" "U1_U_Driver High Current2.8" | length 8.4
  Top Layer w0.5: 25.562,4.278 29.46,4.278 29.517,4.335 29.771,4.335 30.406,3.7 33.708,3.7
"NetC1_U_Driver High Current3_1": "C1_U_Driver High Current3.1" "D1_U_Driver High Current3.2" "U1_U_Driver High Current3.8" | length 8.4
  Top Layer w0.5: 6.237,26.613 10.135,26.613 10.192,26.67 10.446,26.67 11.081,26.035 14.383,26.035
"NetC1_U_Driver High Current4_1": "C1_U_Driver High Current4.1" "D1_U_Driver High Current4.2" "U1_U_Driver High Current4.8" | length 8.4
  Top Layer w0.5: 6.237,4.261 10.135,4.261 10.192,4.318 10.446,4.318 11.081,3.683 14.383,3.683
"NetC1_U_Driver High Current5_1": "C1_U_Driver High Current5.1" "D1_U_Driver High Current5.2" "U1_U_Driver High Current5.8" | length 8.4
  Top Layer w0.5: -13.162,26.613 -9.264,26.613 -9.207,26.67 -8.953,26.67 -8.318,26.035 -5.016,26.035
"NetC1_U_Driver High Current6_1": "C1_U_Driver High Current6.1" "D1_U_Driver High Current6.2" "U1_U_Driver High Current6.8" | length 8.4
  Top Layer w0.5: -13.162,4.261 -9.264,4.261 -9.207,4.318 -8.953,4.318 -8.318,3.683 -5.016,3.683
"NetQ1_U_Driver High Current1_4": "Q1_U_Driver High Current1.4" "R1_U_Driver High Current1.2" | length 2.4
  Top Layer w0.5: 33.708,32.131 33.708,34.544
"NetQ1_U_Driver High Current2_4": "Q1_U_Driver High Current2.4" "R1_U_Driver High Current2.2" | length 2.4
  Top Layer w0.5: 33.708,9.796 33.708,12.209
"NetQ1_U_Driver High Current3_4": "Q1_U_Driver High Current3.4" "R1_U_Driver High Current3.2" | length 2.4
  Top Layer w0.5: 14.383,32.131 14.383,34.544
"NetQ1_U_Driver High Current4_4": "Q1_U_Driver High Current4.4" "R1_U_Driver High Current4.2" | length 2.4
  Top Layer w0.5: 14.383,9.779 14.383,12.192
"NetQ1_U_Driver High Current5_4": "Q1_U_Driver High Current5.4" "R1_U_Driver High Current5.2" | length 2.4
  Top Layer w0.5: -5.016,32.131 -5.016,34.544
"NetQ1_U_Driver High Current6_4": "Q1_U_Driver High Current6.4" "R1_U_Driver High Current6.2" | length 2.4
  Top Layer w0.5: -5.016,9.779 -5.016,12.192
"NetQ2_U_Driver High Current1_4": "Q2_U_Driver High Current1.4" "R2_U_Driver High Current1.2" | length 2.4
  Top Layer w0.5: 25.162,34.544 25.164,34.542 25.164,32.131
"NetQ2_U_Driver High Current2_4": "Q2_U_Driver High Current2.4" "R2_U_Driver High Current2.2" | length 2.4
  Top Layer w0.5: 25.162,12.209 25.164,12.207 25.164,9.796
"NetQ2_U_Driver High Current3_4": "Q2_U_Driver High Current3.4" "R2_U_Driver High Current3.2" | length 2.4
  Top Layer w0.5: 5.837,34.544 5.839,34.542 5.839,32.131
"NetQ2_U_Driver High Current4_4": "Q2_U_Driver High Current4.4" "R2_U_Driver High Current4.2" | length 2.4
  Top Layer w0.5: 5.837,12.192 5.839,12.19 5.839,9.779
"NetQ2_U_Driver High Current5_4": "Q2_U_Driver High Current5.4" "R2_U_Driver High Current5.2" | length 2.4
  Top Layer w0.5: -13.562,34.544 -13.56,34.542 -13.56,32.131
"NetQ2_U_Driver High Current6_4": "Q2_U_Driver High Current6.4" "R2_U_Driver High Current6.2" | length 2.4
  Top Layer w0.5: -13.562,12.192 -13.56,12.19 -13.56,9.779
"NetR1_U_Driver High Current1_1": "R1_U_Driver High Current1.1" "U1_U_Driver High Current1.7" | length 9.1
  Top Layer w0.3: v1(31.496,27.305) 33.708,27.305 ; v1(31.623,30.734) 31.623,32.078 31.676,32.131
  Bottom Layer w0.3: v1(31.496,27.305) 33.274,29.083 33.274,30.099 32.639,30.734 v1(31.623,30.734)
"NetR1_U_Driver High Current2_1": "R1_U_Driver High Current2.1" "U1_U_Driver High Current2.7" | length 11.5
  Top Layer w0.3: v1(31.623,8.399) 31.623,9.743 31.676,9.796 ; 33.708,4.97 35.77,4.97 36,5.2 36,8.1 v1(35.3,8.8)
  Bottom Layer w0.3: v1(31.623,8.399) 32.639,8.399 33.04,8.8 v1(35.3,8.8)
"NetR1_U_Driver High Current3_1": "R1_U_Driver High Current3.1" "U1_U_Driver High Current3.7" | length 9.1
  Top Layer w0.3: v1(12.171,27.305) 14.383,27.305 ; v1(12.298,30.734) 12.298,32.078 12.351,32.131
  Bottom Layer w0.3: v1(12.171,27.305) 13.949,29.083 13.949,30.099 13.314,30.734 v1(12.298,30.734)
"NetR1_U_Driver High Current4_1": "R1_U_Driver High Current4.1" "U1_U_Driver High Current4.7" | length 11.6
  Top Layer w0.3: v1(12.298,8.382) 12.298,9.726 12.351,9.779 ; 14.383,4.953 16.053,4.953 16.576,5.476 16.576,8.324 v1(15.8,9.1)
  Bottom Layer w0.3: v1(12.298,8.382) 15.082,8.382 v1(15.8,9.1)
"NetR1_U_Driver High Current5_1": "R1_U_Driver High Current5.1" "U1_U_Driver High Current5.7" | length 9.1
  Top Layer w0.3: v1(-7.228,27.305) -5.016,27.305 ; v1(-7.101,30.734) -7.101,32.078 -7.048,32.131
  Bottom Layer w0.3: v1(-7.228,27.305) -5.45,29.083 -5.45,30.099 -6.085,30.734 v1(-7.101,30.734)
"NetR1_U_Driver High Current6_1": "R1_U_Driver High Current6.1" "U1_U_Driver High Current6.7" | length 9.1
  Top Layer w0.3: v1(-7.228,4.953) -5.016,4.953 ; v1(-7.101,8.382) -7.101,9.726 -7.048,9.779
  Bottom Layer w0.3: v1(-7.228,4.953) -5.45,6.731 -5.45,7.747 -6.085,8.382 v1(-7.101,8.382)
"NetR2_U_Driver High Current1_1": "R2_U_Driver High Current1.1" "U1_U_Driver High Current1.5" | length 8.4
  Top Layer w0.3: v1(27.178,30.607) 27.178,32.113 27.196,32.131 ; v1(31.75,29.845) 33.708,29.845
  Bottom Layer w0.3: v1(27.178,30.607) 29.337,30.607 30.099,29.845 v1(31.75,29.845)
"NetR2_U_Driver High Current2_1": "R2_U_Driver High Current2.1" "U1_U_Driver High Current2.5" | length 8.4
  Top Layer w0.3: v1(27.178,8.272) 27.178,9.778 27.196,9.796 ; v1(31.75,7.51) 33.708,7.51
  Bottom Layer w0.3: v1(27.178,8.272) 29.337,8.272 30.099,7.51 v1(31.75,7.51)
"NetR2_U_Driver High Current3_1": "R2_U_Driver High Current3.1" "U1_U_Driver High Current3.5" | length 8.4
  Top Layer w0.3: v1(7.853,30.607) 7.853,32.113 7.871,32.131 ; v1(12.425,29.845) 14.383,29.845
  Bottom Layer w0.3: v1(7.853,30.607) 10.012,30.607 10.774,29.845 v1(12.425,29.845)
"NetR2_U_Driver High Current4_1": "R2_U_Driver High Current4.1" "U1_U_Driver High Current4.5" | length 8.4
  Top Layer w0.3: v1(7.853,8.255) 7.853,9.761 7.871,9.779 ; v1(12.425,7.493) 14.383,7.493
  Bottom Layer w0.3: v1(7.853,8.255) 10.012,8.255 10.774,7.493 v1(12.425,7.493)
"NetR2_U_Driver High Current5_1": "R2_U_Driver High Current5.1" "U1_U_Driver High Current5.5" | length 8.4
  Top Layer w0.3: v1(-11.546,30.607) -11.546,32.113 -11.528,32.131 ; v1(-6.974,29.845) -5.016,29.845
  Bottom Layer w0.3: v1(-11.546,30.607) -9.387,30.607 -8.625,29.845 v1(-6.974,29.845)
"NetR2_U_Driver High Current6_1": "R2_U_Driver High Current6.1" "U1_U_Driver High Current6.5" | length 8.4
  Top Layer w0.3: v1(-11.546,8.255) -11.546,9.761 -11.528,9.779 ; v1(-6.974,7.493) -5.016,7.493
  Bottom Layer w0.3: v1(-11.546,8.255) -9.387,8.255 -8.625,7.493 v1(-6.974,7.493)
OUT1: "C1_U_Driver High Current1.2" "C2_U_Driver High Current1.1" "C3_U_Driver High Current1.1" "Q1_U_Driver High Current1.1" "Q1_U_Driver High Current1.2" "Q1_U_Driver High Current1.3" "Q2_U_Driver High Current1.5" "Q2_U_Driver High Current1.6" "Q2_U_Driver High Current1.7" "Q2_U_Driver High Current1.8" "U1_U_Driver High Current1.6" P2.1
OUT2: "C1_U_Driver High Current2.2" "C2_U_Driver High Current2.1" "C3_U_Driver High Current2.1" "Q1_U_Driver High Current2.1" "Q1_U_Driver High Current2.2" "Q1_U_Driver High Current2.3" "Q2_U_Driver High Current2.5" "Q2_U_Driver High Current2.6" "Q2_U_Driver High Current2.7" "Q2_U_Driver High Current2.8" "U1_U_Driver High Current2.6" P2.2
  other v1: 29.009,11.701 29.4,12.83 30.3,12.83 31.2,12.83 31.7,13.4 32.4,13.8 29.4,14.1 30.3,14.1 33.046,14.1 33.946,14.1 31.7,14.19 32.4,14.587 31.7,14.98 29.4,15.37 30.3,15.37 32.4,15.375 33.046,15.37 33.946,15.37 31.7,15.77 32.4,16.162 31.7,16.56 29.4,16.64 30.3,16.64 33.046,16.64 33.946,16.64 32.4,16.95 31.7,17.35 32.6,17.738 33.3,18.1 31.7,18.14 34,18.5 32.6,18.525 31.7,18.93 33.3,19 32.6,19.313 31.7,19.72 32.6,20.1 31.7,20.51 31.7,21.3 36.82,40.3 37.54,40.3 38.26,40.3 38.98,40.3 39.7,40.3 36.2,41.05 36.96,41.05 37.72,41.05 38.48,41.05 39.24,41.05 40,41.05 35.4,41.6 36.475,41.8 37.3,41.8 38.125,41.8 38.95,41.8 39.775,41.8
OUT3: "C1_U_Driver High Current3.2" "C2_U_Driver High Current3.1" "C3_U_Driver High Current3.1" "Q1_U_Driver High Current3.1" "Q1_U_Driver High Current3.2" "Q1_U_Driver High Current3.3" "Q2_U_Driver High Current3.5" "Q2_U_Driver High Current3.6" "Q2_U_Driver High Current3.7" "Q2_U_Driver High Current3.8" "U1_U_Driver High Current3.6" P3.1
OUT4: "C1_U_Driver High Current4.2" "C2_U_Driver High Current4.1" "C3_U_Driver High Current4.1" "Q1_U_Driver High Current4.1" "Q1_U_Driver High Current4.2" "Q1_U_Driver High Current4.3" "Q2_U_Driver High Current4.5" "Q2_U_Driver High Current4.6" "Q2_U_Driver High Current4.7" "Q2_U_Driver High Current4.8" "U1_U_Driver High Current4.6" P3.2
  other v1: 9.684,11.684 10.075,12.813 10.975,12.813 11.875,12.813 12.375,13.383 13.075,13.783 10.075,14.083 10.975,14.083 13.721,14.083 14.621,14.083 12.375,14.173 13.075,14.57 12.375,14.963 10.075,15.353 10.975,15.353 13.721,15.353 14.621,15.353 13.075,15.358 12.375,15.753 13.075,16.145 12.375,16.543 10.075,16.623 10.975,16.623 13.721,16.623 14.621,16.623 13.075,16.933 12.375,17.333 13.275,17.72 13.975,18.083 12.375,18.123 14.675,18.483 13.275,18.508 12.375,18.913 13.975,18.983 13.275,19.295 12.375,19.703 13.275,20.083 12.375,20.493 12.375,21.283 17.495,40.283 18.215,40.283 18.935,40.283 19.655,40.283 20.375,40.283 16.875,41.033 17.635,41.033 18.395,41.033 19.155,41.033 19.915,41.033 20.675,41.033 16.075,41.583 17.15,41.783 17.975,41.783 18.8,41.783 19.625,41.783 20.45,41.783
OUT5: "C1_U_Driver High Current5.2" "C2_U_Driver High Current5.1" "C3_U_Driver High Current5.1" "Q1_U_Driver High Current5.1" "Q1_U_Driver High Current5.2" "Q1_U_Driver High Current5.3" "Q2_U_Driver High Current5.5" "Q2_U_Driver High Current5.6" "Q2_U_Driver High Current5.7" "Q2_U_Driver High Current5.8" "U1_U_Driver High Current5.6" P4.1
OUT6: "C1_U_Driver High Current6.2" "C2_U_Driver High Current6.1" "C3_U_Driver High Current6.1" "Q1_U_Driver High Current6.1" "Q1_U_Driver High Current6.2" "Q1_U_Driver High Current6.3" "Q2_U_Driver High Current6.5" "Q2_U_Driver High Current6.6" "Q2_U_Driver High Current6.7" "Q2_U_Driver High Current6.8" "U1_U_Driver High Current6.6" P4.2
  other v1: -9.715,11.684 -9.324,12.813 -8.424,12.813 -7.524,12.813 -7.024,13.383 -6.324,13.783 -9.324,14.083 -8.424,14.083 -5.678,14.083 -4.778,14.083 -7.024,14.173 -6.324,14.57 -7.024,14.963 -9.324,15.353 -8.424,15.353 -5.678,15.353 -4.778,15.353 -6.324,15.358 -7.024,15.753 -6.324,16.145 -7.024,16.543 -9.324,16.623 -8.424,16.623 -5.678,16.623 -4.778,16.623 -6.324,16.933 -7.024,17.333 -6.124,17.72 -5.424,18.083 -7.024,18.123 -4.724,18.483 -6.124,18.508 -7.024,18.913 -5.424,18.983 -6.124,19.295 -7.024,19.703 -6.124,20.083 -7.024,20.493 -7.024,21.283 -1.904,40.283 -1.184,40.283 -0.464,40.283 0.256,40.283 0.976,40.283 -2.524,41.033 -1.764,41.033 -1.004,41.033 -0.244,41.033 0.516,41.033 1.276,41.033 -3.324,41.583 -2.249,41.783 -1.424,41.783 -0.599,41.783 0.226,41.783 1.051,41.783
SD1: "U1_U_Driver High Current1.3" "U1_U_Driver High Current2.3" P1.8 | length 27.6
  Top Layer w0.3: 38.608,6.24 40.14,6.24 40.7,6.8 40.7,19.491 P1.8 ; 38.608,28.575 40.529,28.575 v1(40.554,28.6)
  Bottom Layer w0.3: v1(40.554,28.6) 41.264,27.89 41.264,22.363 P1.8
SD3: "U1_U_Driver High Current3.3" "U1_U_Driver High Current4.3" P1.11 | length 55
  Top Layer w0.3: 19.283,6.223 21.323,6.223 22.2,7.1 v1(22.2,8.3) ; 19.283,28.575 19.296,28.587 20.787,28.587 v1(20.8,28.6) ; v1(32.6,33.6) 32.6,31.1 33,30.7 34.9,30.7 35.5,31.3 39.947,31.3 P1.11
  Bottom Layer w0.3: v1(22.2,8.3) 21.5,9 21.5,15.975 20.204,17.271 20.204,26.52 20.242,26.558 20.242,28.042 v1(20.8,28.6) 25.8,33.6 v1(32.6,33.6)
SD5: "U1_U_Driver High Current5.3" "U1_U_Driver High Current6.3" P1.14 | length 113.8
  Top Layer w0.3: -0.116,6.223 1.677,6.223 2.334,5.566 v1(2.334,4.129) ; -0.116,28.575 -0.113,28.572 1.538,28.572 v1(1.541,28.568)
  Bottom Layer w0.3: v1(1.541,28.568) 2.405,27.705 2.405,27.105 -2.241,22.459 -2.241,9.541 2.334,4.966 v1(2.334,4.129) 2.326,4.12 2.326,3.229 3.916,1.639 37.939,1.639 38.404,2.104 40.413,2.104 41.171,1.346 43.529,1.346 44.173,1.99 44.173,34.694 P1.14

## Polygon pours and split planes (outlines as drawn)
GND on Bottom Layer "BOT" (solid, remove dead copper, pour order 1): -18,0 -18,50.038 44.704,50.038 44.704,0
GND on Top Layer "TOP" (solid, remove dead copper, pour order 0): -18,0 -18,50.038 44.704,50.038 44.704,0

## Keep-outs
Keep-Out Layer:
  the board outline again, w0.254

## Other copper
Top Layer:
  region net OUT1: 34.343,28.925 31.834,28.925 30.66,30.099 30.66,33.655 31.041,34.036 30.66,34.417 28.628,34.417 28.628,31.115 28.247,30.734 28.247,28.956 28.974,28.229 34.343,28.229
  region net +24V: 40,16.365 39.7,16.665 36.9,16.665 36,15.765 36,9.764 36.03,9.734 40,9.734 40,10.165
  region net OUT2: 29.009,11.701 28.628,12.082 28.628,17.035 29.136,17.543 29.136,22.242 29.263,22.369 31.168,22.369 35.105,18.432 35.105,13.225 34.851,12.971 32.311,12.971 31.041,11.701
  region net +24V: 40,38.7 39.7,39 36.9,39 36,38.1 36,32.099 36.03,32.069 40,32.069 40,32.5
  region net GND: 23.7,35.306 23.7,42.824 25.58,44.704 28.247,44.704 28.247,39.878 26.54,38.171 26.54,35.306
  region net GND: 7.213,12.956 2.902,12.956 2.173,13.685 2.173,40.609 4.373,42.809 4.373,24.234 6.253,22.354
  region net GND: 4.375,12.954 4.375,20.472 6.255,22.352 8.922,22.352 8.922,17.526 7.215,15.819 7.215,12.954
  region net OUT3: 9.684,34.036 9.303,34.417 9.303,39.37 9.811,39.878 9.811,44.577 9.938,44.704 11.843,44.704 15.78,40.767 15.78,35.56 15.526,35.306 12.986,35.306 11.716,34.036
  region net GND: 4.375,35.306 4.375,42.824 6.255,44.704 8.922,44.704 8.922,39.878 7.215,38.171 7.215,35.306
  region net +24V: 20.675,38.7 20.375,39 17.575,39 16.675,38.1 16.675,32.099 16.705,32.069 20.675,32.069 20.675,32.5
  region net OUT2: 32.7,48.5 32.7,43.8 36.6,39.9 39.9,39.9 40.4,40.4 40.4,43.9 35.8,48.5
  region net OUT1: 29.009,34.036 28.628,34.417 28.628,39.37 29.136,39.878 29.136,44.577 29.263,44.704 31.168,44.704 35.105,40.767 35.105,35.56 34.851,35.306 32.311,35.306 31.041,34.036
  region net GND: 26.54,12.971 22.229,12.971 21.5,13.7 21.5,40.624 23.7,42.824 23.7,24.249 25.58,22.369
  region net OUT4: 13.375,48.5 13.375,43.8 17.275,39.9 20.575,39.9 21.075,40.4 21.075,43.9 16.475,48.5
  region net OUT1: 31.168,44.704 31.168,48.932 30.4,49.7 29.2,49.7 28.5,49 28.5,45.213 29.136,44.577
  region net OUT3: 11.843,44.704 11.843,48.932 11.075,49.7 9.875,49.7 9.175,49 9.175,45.213 9.811,44.577
  region net OUT5: -7.556,44.704 -7.556,48.932 -8.324,49.7 -9.524,49.7 -10.224,49 -10.224,45.213 -9.588,44.577
  region net OUT6: -4.381,6.573 -6.89,6.573 -8.064,7.747 -8.064,11.303 -7.683,11.684 -8.064,12.065 -10.096,12.065 -10.096,8.763 -10.477,8.382 -10.477,6.604 -9.75,5.877 -4.381,5.877
  region net GND: -15.024,12.954 -15.024,20.472 -13.144,22.352 -10.477,22.352 -10.477,17.526 -12.184,15.819 -12.184,12.954
  region net OUT5: -4.381,28.925 -6.89,28.925 -8.064,30.099 -8.064,33.655 -7.683,34.036 -8.064,34.417 -10.096,34.417 -10.096,31.115 -10.477,30.734 -10.477,28.956 -9.75,28.229 -4.381,28.229
  region net GND: -15.024,35.306 -15.024,42.824 -13.144,44.704 -10.477,44.704 -10.477,39.878 -12.184,38.171 -12.184,35.306
  region net GND: -12.184,12.954 -16.495,12.954 -17.224,13.683 -17.224,40.607 -15.024,42.807 -15.024,24.232 -13.144,22.352
  region net OUT6: -6.024,48.5 -6.024,43.8 -2.124,39.9 1.176,39.9 1.676,40.4 1.676,43.9 -2.924,48.5
  region net OUT3: 15.018,28.925 12.509,28.925 11.335,30.099 11.335,33.655 11.716,34.036 11.335,34.417 9.303,34.417 9.303,31.115 8.922,30.734 8.922,28.956 9.649,28.229 15.018,28.229
  region net +24V: 1.276,16.348 0.976,16.648 -1.824,16.648 -1.824,9.717 1.276,9.717 1.276,10.148
  region net GND: 23.7,12.971 23.7,20.489 25.58,22.369 28.247,22.369 28.247,17.543 26.54,15.837 26.54,12.971
  region net OUT4: 15.018,6.573 12.509,6.573 11.335,7.747 11.335,11.303 11.716,11.684 11.335,12.065 9.303,12.065 9.303,8.763 8.922,8.382 8.922,6.604 9.649,5.877 15.018,5.877
  region net OUT4: 9.684,11.684 9.303,12.065 9.303,17.018 9.811,17.526 9.811,22.225 9.938,22.352 11.843,22.352 15.78,18.415 15.78,13.208 15.526,12.954 12.986,12.954 11.716,11.684
  region net +24V: 20.675,16.348 20.375,16.648 17.575,16.648 16.675,15.748 16.675,9.747 16.705,9.717 20.675,9.717 20.675,10.148
  region net OUT5: -9.715,34.036 -10.096,34.417 -10.096,39.37 -9.588,39.878 -9.588,44.577 -9.461,44.704 -7.556,44.704 -3.619,40.767 -3.619,35.56 -3.873,35.306 -6.413,35.306 -7.683,34.036
  region net +24V: 1.276,38.7 0.976,39 -1.824,39 -2.724,38.1 -2.724,32.099 -2.694,32.069 1.276,32.069 1.276,32.5
  region net OUT6: -9.715,11.684 -10.096,12.065 -10.096,17.018 -9.588,17.526 -9.588,22.225 -9.461,22.352 -7.556,22.352 -3.619,18.415 -3.619,13.208 -3.873,12.954 -6.413,12.954 -7.683,11.684
  region net OUT2: 34.343,6.59 31.834,6.59 30.66,7.764 30.66,11.32 31.041,11.701 30.66,12.082 28.628,12.082 28.628,8.78 28.247,8.399 28.247,6.621 28.974,5.894 34.343,5.894
Bottom Layer:
  region net +24V: 37.1,3.1 41.1,3.1 41.6,2.6 43.2,2.6 43.2,11.3 39.4,15.1 39.4,23 39.1,23.3 39.1,28.7 40.4,30 40.4,38.3 39.7,39 36.9,39 36,38.1 36,8.1 34.2,6.3
  region net +24V: 18.6,6.2 8.7,6.2 7.2,7.7 7.2,37.4 5.6,39 -1.8,39 -2.7,38.1 -2.7,32.1 -1.4,30.8 1.5,30.8 2.9,29.4 2.9,26.6 -1.5,22.2 -1.5,9.7 2.6,5.6 5.1,3.1 20.7,3.1
  region net +24V: 20.4,39 17.5,39 16.6,38.1 16.6,5.9 19.4,3.1 37.1,3.1 37.1,6.7 22.6,6.7 19.8,9.5 19.8,30.7 21.2,32.1 21.2,38.2
  region net OUT6: -3.624,13.183 -5.524,11.283 -10.124,11.283 -10.124,16.983 -9.624,17.483 -7.624,17.483 -7.424,17.683 -7.424,25.975 -5.099,28.3 -5.099,42.083 1.676,42.083 1.676,40.383 1.176,39.883 -1.924,39.883 -3.199,38.608 -3.199,13.608 -3.824,12.983
  region net OUT2: 35.1,13.2 33.2,11.3 28.6,11.3 28.6,17 29.1,17.5 31.1,17.5 31.3,17.7 31.3,25.992 33.625,28.317 33.625,42.1 40.4,42.1 40.4,40.4 39.9,39.9 36.8,39.9 35.525,38.625 35.525,13.625 34.9,13
  region net OUT4: 15.775,13.183 13.875,11.283 9.275,11.283 9.275,16.983 9.775,17.483 11.775,17.483 11.975,17.683 11.975,25.975 14.3,28.3 14.3,42.083 21.075,42.083 21.075,40.383 20.575,39.883 17.475,39.883 16.2,38.608 16.2,13.608 15.575,12.983
  region net GND: 44.7,50 44.7,38.7 44.2,38.2 41.3,38.2 40.7,38.8 40.7,42.2 40.4,42.5 33.5,42.5 30.5,39.5 21.5,39.5 21.5,42.2 21.1,42.6 14.3,42.6 11.1,39.4 11,39.5 2.1,39.5 2.1,42.1 1.7,42.5 -5.2,42.5 -8.9,38.8 -17.3,38.8 -17.3,46.2 28.7,46.2 36.6,46.2 40.4,50